# Allegro board interface.brd
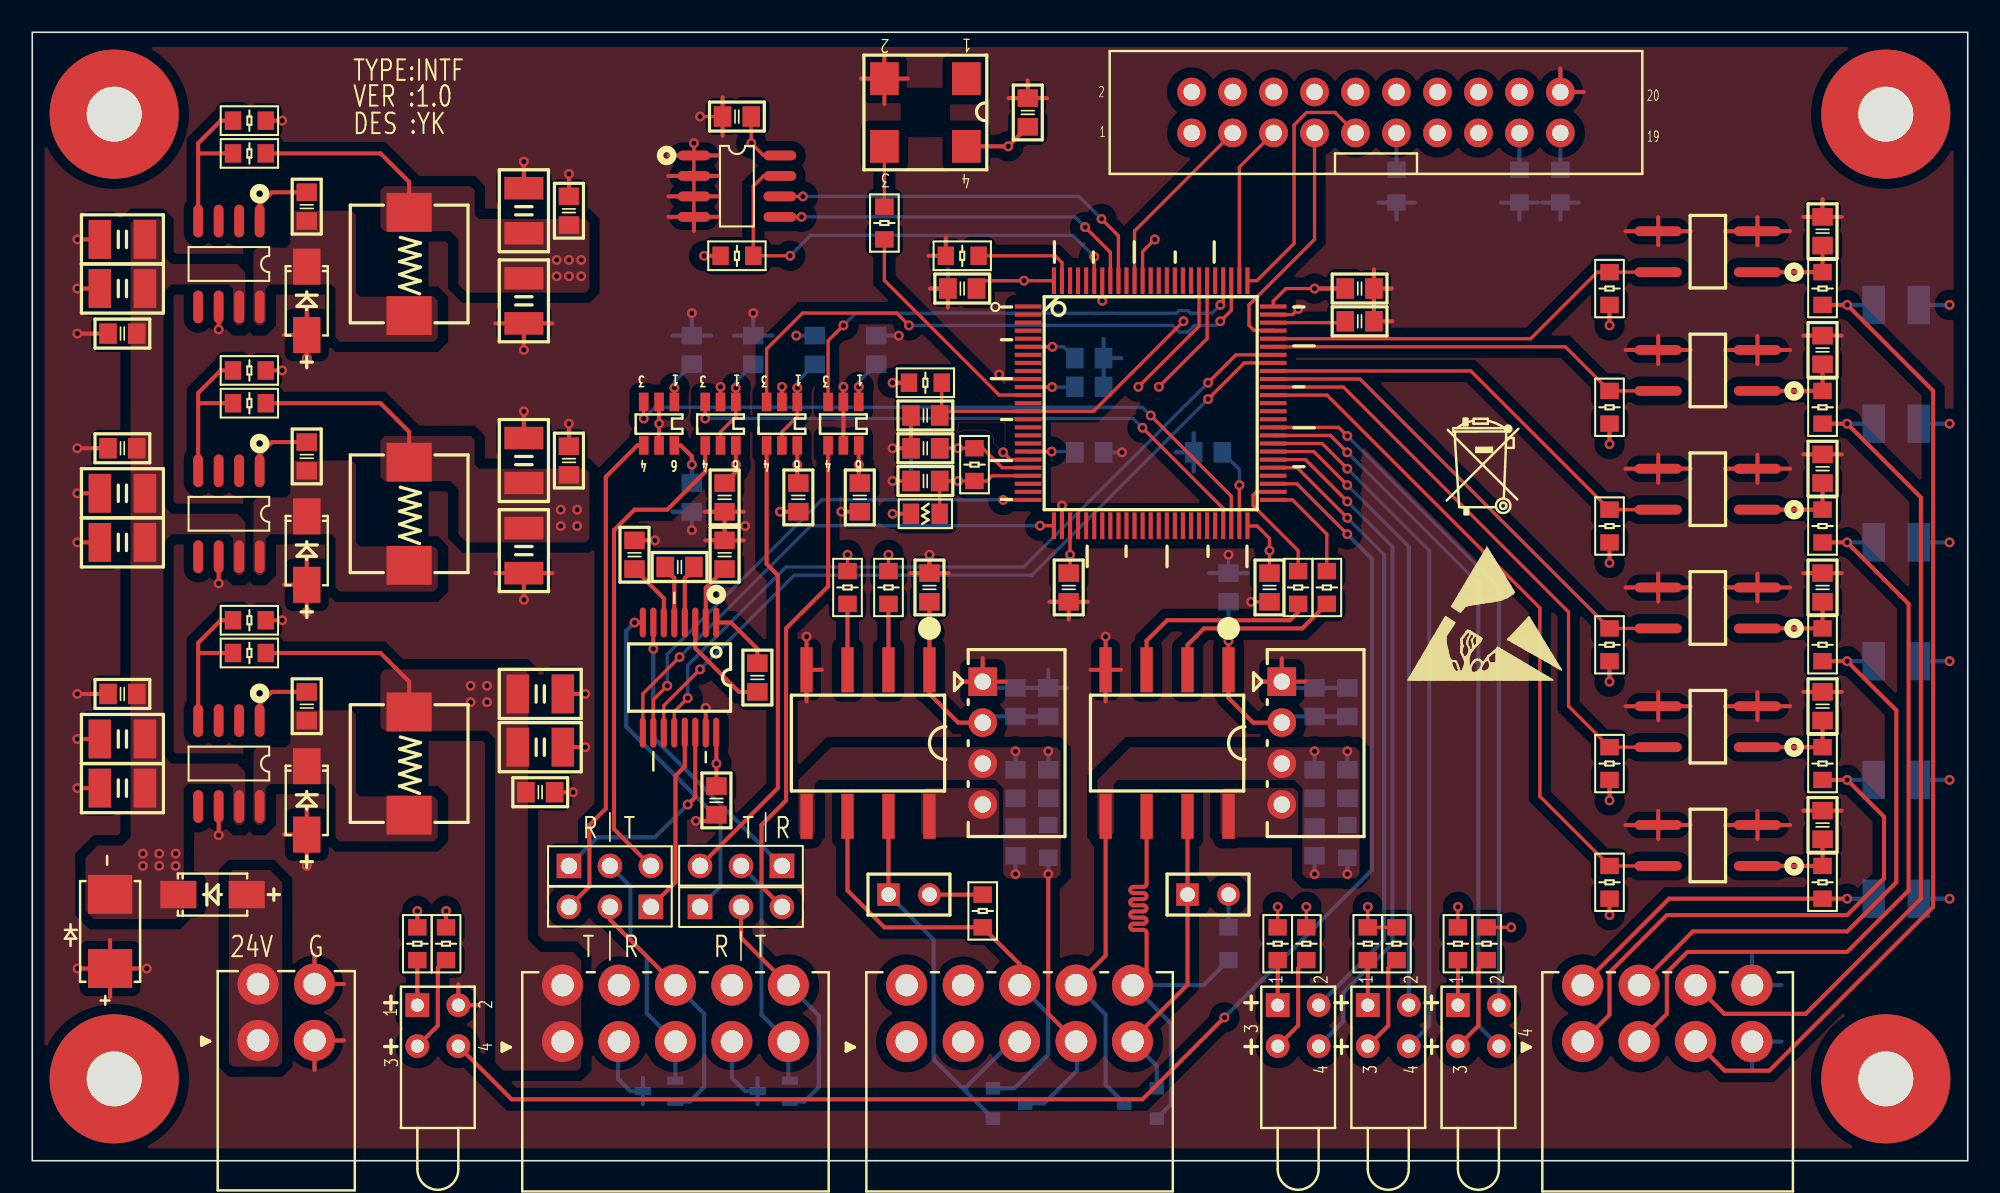
[diagram p0: board, top side]
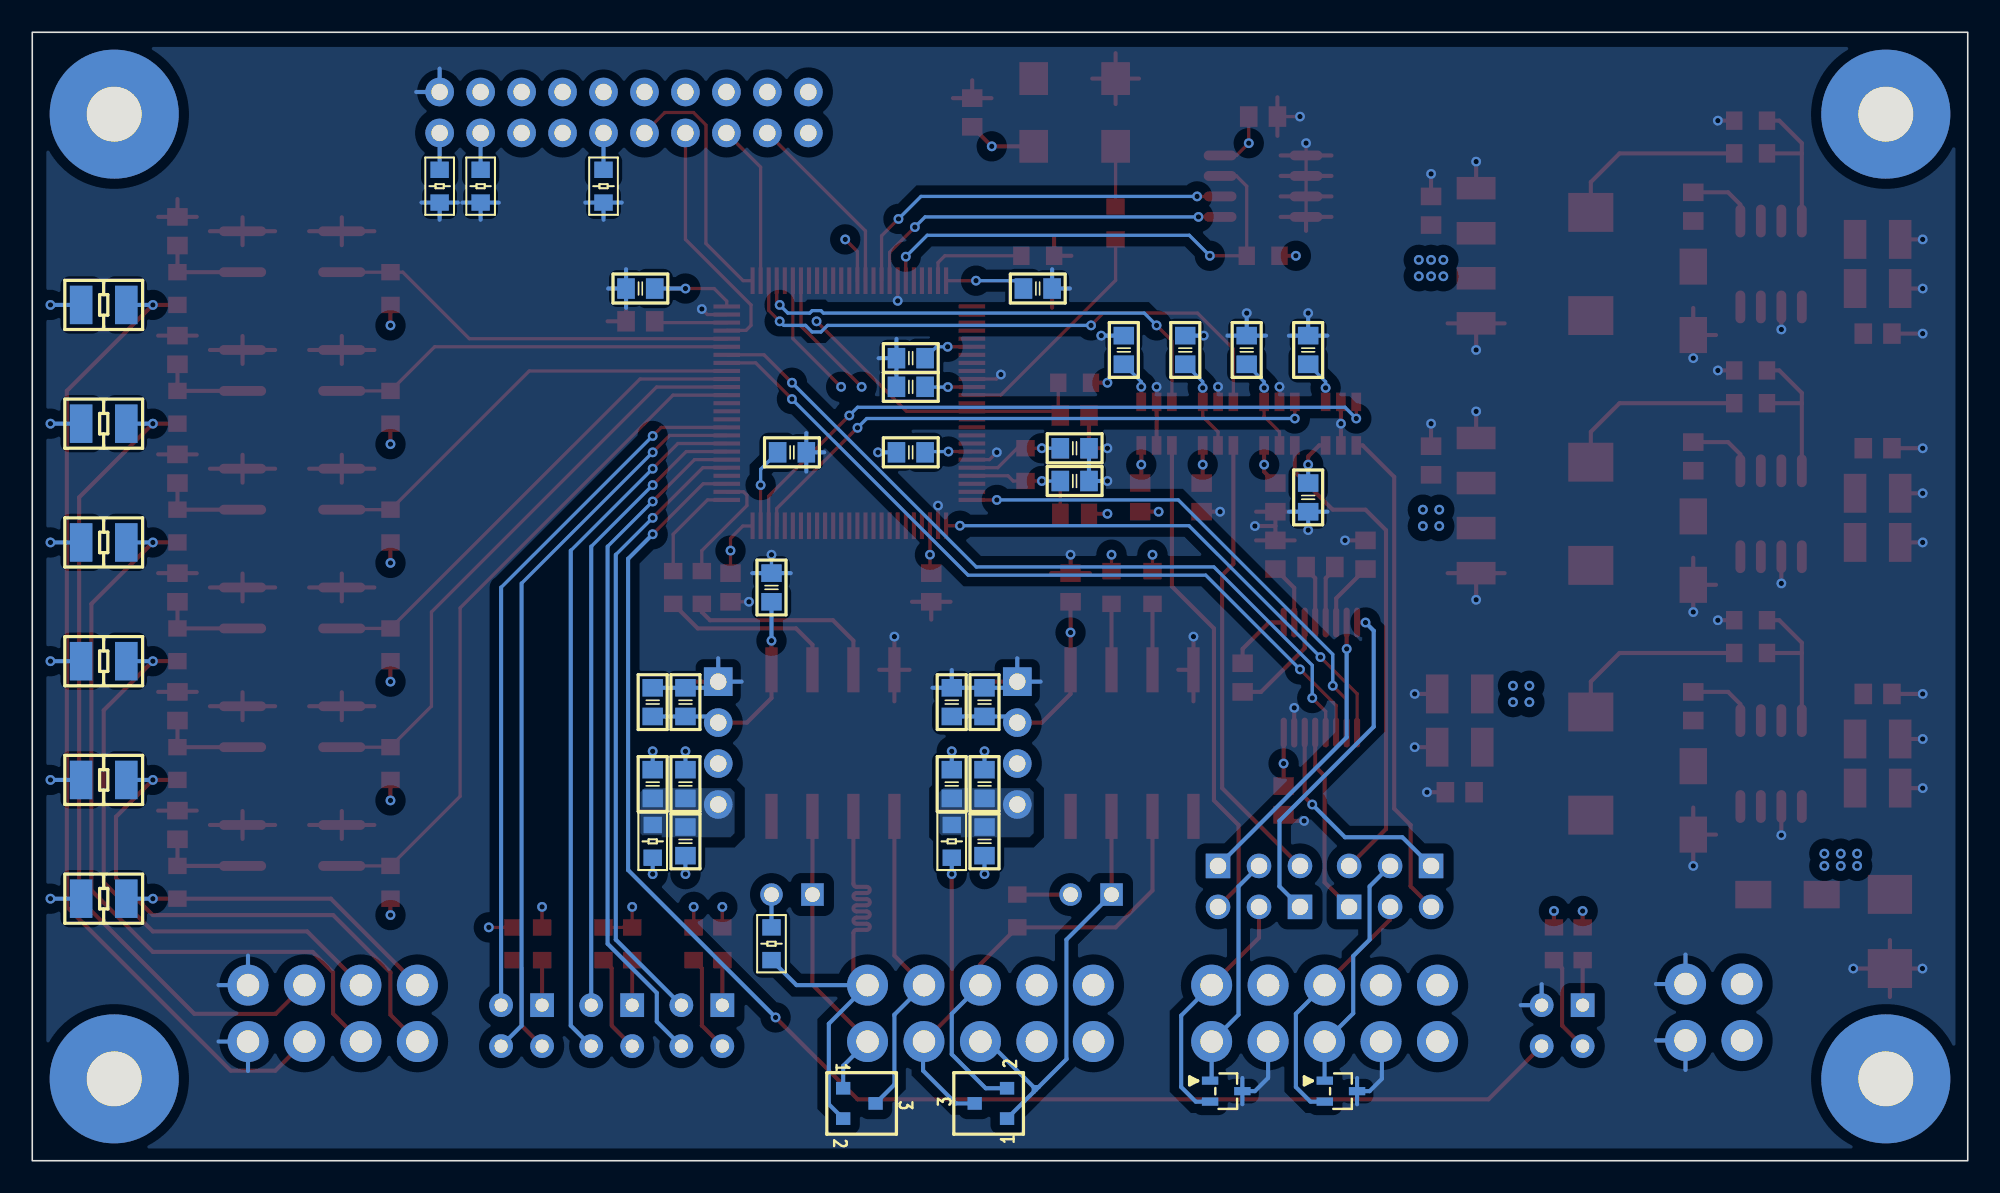
[diagram p1: board, bottom side, seen from below]

Outline 120 x 70 mm; copper layers: TOP, POWRE, GND, BOTTOM. Coordinates in mm from the lower left corner of the outline.
Outline path: rectangle 0,0 120,70

## Design rules (mm)
constraint set DEFAULT: min track width 0.203

## Placement (name value [footprint] x y rotation side)
C1  0.1uF  [C0805]  76.71 35.56 270 top
C2  0.1uF  [C0805]  55.37 44.2 180 bottom
C3  0.1uF  [C0805]  57.66 54.1 180 top
C4  0.1uF  [C0805]  82.3 54.1 0 bottom
C5  0.1uF  [C0805]  65.53 49.78 0 bottom
C6  0.1uF  [C0805]  65.53 48.01 0 bottom
C7  0.1uF  [C0805]  64.26 35.56 270 top
C8  1uF/16V  [C0805]  55.37 44.2 180 top
C9  10uF/16V  [C0805]  57.66 54.1 180 bottom
C10  1uF/16V  [C0805]  82.3 54.1 0 top
C11  0.1uF  [C0805]  65.53 43.94 0 bottom
C12  10uF/16V  [C0805]  82.3 52.07 0 top
C13  10uF/16V  [C0805]  72.9 43.94 180 bottom
C14  1uF/16V  [C0805]  55.37 42.16 180 top
C15  0.1uF  [C0805]  55.37 42.16 180 bottom
C16  0.1uF  [C0805]  61.72 65.02 90 top
C17  0.1uF  [C0805]  55.37 46.23 0 top
C18  0.1uF  [C0805]  44.96 29.97 90 top
C19  0.1uF  [C0805]  40.13 36.83 0 top
C20  0.1uF  [C0805]  42.42 22.35 270 top
C21  0.1uF  [C0805]  42.93 37.59 90 top
C22  0.1uF  [C0805]  37.34 37.59 90 top
C23  0.1uF  [C0805]  40.89 50.29 90 bottom
C24  0.1uF  [C0805]  42.93 41.15 270 top
C25  0.1uF  [C0805]  52.32 50.29 90 bottom
C26  0.1uF  [C0805]  40.89 41.15 270 bottom
C27  0.1uF  [C0805]  43.69 64.77 180 top
C28  0.1uF  [C0805]  47.5 41.15 270 top
C29  0.1uF  [C0805]  48.51 50.29 90 bottom
C30  0.1uF  [C0805]  51.31 41.15 270 top
C31  0.1uF  [C0805]  44.7 50.29 270 bottom
C32  0.1uF  [C0805]  62.99 28.45 90 bottom
C33  1uF/16V  [C0805]  55.63 35.56 90 top
C34  10uF/25V  [C0805]  60.96 19.81 90 bottom
C35  0.1uF  [C0805]  60.96 23.37 90 bottom
C36  1uF/16V  [C0805]  62.99 23.37 90 bottom
C37  4.7uF  [C0805]  60.96 28.45 90 bottom
C38  0.1uF  [C0805]  81.53 28.45 90 bottom
C39  1uF/16V  [C0805]  74.17 35.56 90 bottom
C40  10uF/25V  [C0805]  79.5 19.81 90 bottom
C41  0.1uF  [C0805]  81.53 23.37 90 bottom
C42  1uF/16V  [C0805]  79.5 23.37 90 bottom
C43  4.7uF  [C0805]  79.5 28.45 90 bottom
C44  0.1uF  [C0805]  111 28.19 90 top
C45  0.1uF  [C0805]  111 35.56 90 top
C46  0.1uF  [C0805]  111 20.83 90 top
C47  0.1uF  [C0805]  111 57.66 90 top
C48  0.1uF  [C0805]  111 42.93 90 top
C49  0.1uF  [C0805]  111 50.29 90 top
C50  0.01uF  [C0805]  17.02 28.19 270 top
C51  10uF/50V  [C1210]  5.59 23.11 180 top
C52  10uF/50V  [C1210]  5.59 26.16 180 top
C53  0.1uF  [C0805]  5.59 28.96 180 top
C55  22uF/25V  [C1210]  31.5 28.96 0 top
C56  22uF/25V  [C1210]  31.5 25.65 0 top
C57  1uF/25V  [C0805]  31.5 22.86 0 top
C61  0.01uF  [C0805]  17.02 43.69 270 top
C62  10uF/50V  [C1210]  5.59 41.4 180 top
C63  10uF/50V  [C1210]  5.59 38.35 180 top
C64  0.1uF  [C0805]  5.59 44.2 180 top
C65  22uF/25V  [C1210]  30.48 43.43 90 top
C66  22uF/25V  [C1210]  30.48 37.85 270 top
C67  1uF/25V  [C0805]  33.27 43.43 90 top
C68  0.01uF  [C0805]  17.02 59.18 270 top
C69  10uF/50V  [C1210]  5.59 57.15 180 top
C70  10uF/50V  [C1210]  5.59 54.1 180 top
C71  0.1uF  [C0805]  5.59 51.31 180 top
C72  22uF/25V  [C1210]  30.48 53.34 270 top
C73  22uF/25V  [C1210]  30.48 58.93 90 top
C74  1uF/25V  [C0805]  33.27 58.93 90 top
D1  SSB-LX2300  [LED2X2_54MM]  23.88 9.65 90 top
D2  SSB-LX2300  [LED2X2_54MM]  88.39 9.65 90 top
D3  SSB-LX2300  [LED2X2_54MM]  77.22 9.65 90 top
D4  SSB-LX2300  [LED2X2_54MM]  82.8 9.65 90 top
D9  PSM712  [SOT-23]  60.71 3.56 90 bottom
D10  PSM712  [SOT-23]  68.58 3.56 270 bottom
D11  1N5822  [DO-214AC]  11.18 16.51 0 top
D12  SMAJ26A  [SMA2_350X600]  4.83 14.22 90 top
D13  1N5822  [DO-214AC]  17.02 22.35 270 top
D14  1N5822  [DO-214AC]  17.02 37.85 270 top
D15  1N5822  [DO-214AC]  17.02 53.34 270 top
J1  CON3  [SIP3-100]  35.81 18.29 180 top
J2  CON3  [SIP3-100]  43.94 18.29 0 top
J3  CON3  [SIP3-100]  35.81 15.75 0 top
J4  CON3  [SIP3-100]  43.94 15.75 180 top
J5  CON2  [SIP2]  54.36 16.51 0 top
J6  CON2  [SIP2]  72.9 16.51 0 top
J7  KF2EDGKRH-3.5-4P  [KF2EDGKRH-3_5-4P]  15.75 10.41 0 top
J8  KF2EDGKRH-3.5-10P  [KF2EDGKRH-3_5-10P]  39.88 9.14 0 top
J9  KF2EDGKRH-3.5-10P  [KF2EDGKRH-3_5-10P]  61.21 9.14 0 top
J10  CON1  [MTHP340_800]  5.08 5.08 0 top
J11  CON1  [MTHP340_800]  114.92 64.92 0 top
J12  CON1  [MTHP340_800]  114.92 5.08 0 top
J13  CON1  [MTHP340_800]  5.08 64.92 0 top
J14  KF2EDGKRH-3.5-8P  [KF2EDGKRH-3_5-8P]  103.12 9.14 0 top
L1  BEAD  [L0805]  55.37 40.13 0 top
L2  68uH/0.5A  [SPL2_730X730-MS73-561MT]  23.37 24.64 90 top
L3  68uH/0.5A  [SPL2_730X730-MS73-561MT]  23.37 40.13 90 top
L4  68uH/0.5A  [SPL2_730X730-MS73-561MT]  23.37 55.63 90 top
NOREF  -  []  92.46 43.18 0 top
NOREF#2  -  []  90.17 33.02 0 top
R1  51R  [R0805]  58.42 43.18 270 top
R2  1K  [R0805]  23.88 13.46 90 top
R3  1K  [R0805]  25.65 13.46 90 top
R4  1K  [R0805]  88.39 13.46 90 top
R5  1K  [R0805]  90.17 13.46 90 top
R6  1K  [R0805]  77.22 13.46 90 top
R7  1K  [R0805]  78.99 13.46 90 top
R8  1K  [R0805]  82.8 13.46 90 top
R9  1K  [R0805]  84.58 13.46 90 top
R10  33R  [R0805]  52.83 58.17 90 top
R11  10K  [R0805]  55.37 48.26 0 top
R12  0R  [R0805]  57.66 56.13 0 top
R13  10K  [R0805]  84.58 60.45 90 bottom
R14  10K  [R0805]  92.2 60.45 90 bottom
R15  10K  [R0805]  94.74 60.45 90 bottom
R20  4.7K  [R0805]  43.69 56.13 0 top
R21  120R  [R0805]  58.93 15.49 270 top
R22  1K  [R0805]  53.09 35.56 270 top
R23  0R  [R0805]  50.55 35.56 270 top
R24  1K  [R0805]  62.99 19.81 270 bottom
R25  120R  [R0805]  74.17 13.46 270 bottom
R26  1K  [R0805]  80.26 35.56 270 top
R27  0R  [R0805]  78.49 35.56 270 top
R28  1K  [R0805]  81.53 19.81 270 bottom
R29  2K  [R1210]  115.57 23.62 180 bottom
R30  4.7K  [R0805]  97.79 24.64 90 top
R31  2K  [R1210]  115.57 30.99 180 bottom
R32  4.7K  [R0805]  97.79 32 90 top
R33  4.7K  [R0805]  111 24.64 90 top
R34  4.7K  [R0805]  111 32 90 top
R35  2K  [R1210]  115.57 16.26 180 bottom
R36  4.7K  [R0805]  97.79 17.27 90 top
R37  2K  [R1210]  115.57 53.09 180 bottom
R38  4.7K  [R0805]  97.79 54.1 90 top
R39  4.7K  [R0805]  111 17.27 90 top
R40  4.7K  [R0805]  111 54.1 90 top
R41  2K  [R1210]  115.57 38.35 180 bottom
R42  4.7K  [R0805]  97.79 39.37 90 top
R43  2K  [R1210]  115.57 45.72 180 bottom
R44  4.7K  [R0805]  97.79 46.74 90 top
R45  4.7K  [R0805]  111 39.37 90 top
R46  4.7K  [R0805]  111 46.74 90 top
R47  1K/1%  [R0805]  13.46 33.53 180 top
R48  9.1K/1%  [R0805]  13.46 31.5 0 top
R51  1K/1%  [R0805]  13.46 49.02 180 top
R52  11K/1%  [R0805]  13.46 46.99 0 top
R55  1K/1%  [R0805]  13.46 64.52 180 top
R56  11K/1%  [R0805]  13.46 62.48 0 top
U1  STM32F207VGT6  [QFP100-050-1414]  69.34 46.99 270 top
U2  STM32xx  [JTAG2X10]  71.88 63.75 0 top
U3  TPD2E007DCKR  [SC70-3]  38.86 4.32 270 bottom
U4  MAX3232EEAE  [SOP16_065-790X633]  40.13 29.97 270 top
U5  TPD2E007DCKR  [SC70-3]  45.97 4.32 270 bottom
U6  SN74LVC1T45DBVR  [SOT-23-6P]  42.67 45.72 180 top
U7  SN74LVC1T45DBVR  [SOT-23-6P]  46.48 45.72 180 top
U8  SN74LVC1T45DBVR  [SOT-23-6P]  38.86 45.72 180 top
U9  SN74LVC1T45DBVR  [SOT-23-6P]  50.29 45.72 180 top
U10  AT24C02C  [SOP8_127-620X500]  43.69 60.45 0 top
U11  ISO1050DUB  [SOP8_100_110X30]  51.82 25.91 270 top
U12  B0305S-1W  [PWR4_B0505S-1W]  58.93 29.72 270 top
U13  ISO1050DUB  [SOP8_100_110X30]  70.36 25.91 270 top
U14  B0305S-1W  [PWR4_B0505S-1W]  77.47 29.72 270 top
U15  EL357  [SOP4_254-730X450]  103.89 26.92 180 top
U16  EL357  [SOP4_254-730X450]  103.89 34.29 180 top
U17  EL357  [SOP4_254-730X450]  103.89 19.56 180 top
U18  EL357  [SOP4_254-730X450]  103.89 56.39 180 top
U19  EL357  [SOP4_254-730X450]  103.89 41.66 180 top
U20  EL357  [SOP4_254-730X450]  103.89 49.02 180 top
U21  LM2674MX-ADJ  [SOP8_127-620X500]  12.19 24.64 270 top
U24  LM2674MX-ADJ  [SOP8_127-620X500]  12.19 40.13 270 top
U25  LM2674MX-ADJ  [SOP8_127-620X500]  12.19 55.63 270 top
Y1  25MHz  [X4-0705]  55.37 65.02 180 top

## Library data of the parts
C1-C17 C23-C53 C55-C57 C61-C74 = CAP NP: Tolerance: #TOL; User Part Number: HAMP
C18-C22 = C: Tolerance: #TOL; User Part Number: HAMP
D1-D4 = SSB-LX2300_0: Tolerance: #TOL; User Part Number: HAMP
D9 D10 = ZC2813E/SOT_0: Tolerance: #TOL; User Part Number: HAMP
D11 D13-D15 = DIODE_0: Tolerance: #TOL; User Part Number: HAMP
D12 = ZC2800E/SOT_1: Tolerance: #TOL; User Part Number: HAMP
J1-J4 = CON3: User Part Number: HAMP; Tolerance: #TOL
J5 J6 = CON2: Tolerance: #TOL; User Part Number: HAMP
J7 = CON4
J8 J9 = CON10A
J10-J13 = CON1: User Part Number: HAMP; Tolerance: #TOL
J14 = CON8A
L1-L4 = INDUCTOR: Tolerance: #TOL; User Part Number: HAMP
R1-R15 R20-R48 R51 R52 R55 R56 = R: Tolerance: #TOL; User Part Number: HAMP
U1 = STM32F207VGT6: User Part Number: HAMP; Tolerance: #TOL
U2 = STM32_JTAG
U3 U5 = TPD2E007
U4 = MAX3232EEAE: Tolerance: #TOL; User Part Number: HAMP
U6-U9 = SN74LVC1T45DBVR: Tolerance: #TOL
U10 = AT24C0x: Tolerance: #TOL; User Part Number: HAMP
U11 U13 = ISO1050
U12 U14 = B0505S-1W: Tolerance: #TOL; User Part Number: HAMP
U15-U20 = PC817: User Part Number: HAMP; Tolerance: #TOL
U21 U24 U25 = LM2674-ADJ: Tolerance: #TOL; User Part Number: HAMP
Y1 = OSC-D36A-ZPB: Tolerance: #TOL; User Part Number: HAMP

## Footprints (pads in the part's own frame, mm; a bottom-side part is the same pattern mirrored in y, then rotated)
C0805
  rect 1.092x1.27 smd: 1(-0.889,0) 2(0.889,0)
C1210
  rect 1.397x2.413 smd: 1(-1.397,0) 2(1.397,0)
DO-214AC
  rect 2.235x1.702 smd: 1(2.121,0) 2(-2.121,0)
JTAG2X10
  round 1.778 hole 1.016: 1(0,0) 2(0,2.54) 3(2.54,0) 4(2.54,2.54) 5(5.08,0) 6(5.08,2.54) 7(7.62,0) 8(7.62,2.54) 9(10.16,0) 10(10.16,2.54) 11(12.7,0) 12(12.7,2.54) 13(15.24,0) 14(15.24,2.54) 15(17.78,0) 16(17.78,2.54) 17(20.32,0) 18(20.32,2.54) 19(22.86,0) 20(22.86,2.54)
KF2EDGKRH-3_5-4P
  round 2.54 hole 1.397: 1(-1.75,-2.949) 2(-1.75,0.549) 3(1.75,-2.949) 4(1.75,0.549)
KF2EDGKRH-3_5-8P
  round 2.54 hole 1.397: 1(-7,-1.75) 2(-7,1.75) 3(-3.5,-1.75) 4(-3.5,1.75) 5(0,-1.75) 6(0,1.75) 7(3.5,-1.75) 8(3.5,1.75)
KF2EDGKRH-3_5-10P
  round 2.54 hole 1.397: 1(-7,-1.75) 2(-7,1.75) 3(-3.5,-1.75) 4(-3.5,1.75) 5(0,-1.75) 6(0,1.75) 7(3.5,-1.75) 8(3.5,1.75) 9(7,-1.75) 10(7,1.75)
L0805
  rect 1.021x1.27 smd: 1(-0.889,0) 2(0.889,0)
LED2X2_54MM
  rect 1.473x1.473 hole 0.813: 1(0,0)
  round 1.473 hole 0.813: 2(0,-2.54) 3(-2.54,0) 4(-2.54,-2.54)
MTHP340_800
  round 8.001 hole 3.404: 1(0,0)
PWR4_B0505S-1W
  rect 1.778x1.778 hole 1.016: 1(0,0)
  round 1.778 hole 1.016: 2(2.54,0) 3(5.08,0) 4(7.62,0)
QFP100-050-1414
  rect 0.254x1.651 smd: 1(-6,-7.6) 2(-5.499,-7.6) 3(-4.999,-7.6) 4(-4.501,-7.6) 5(-4,-7.6) 6(-3.5,-7.6) 7(-3,-7.6) 8(-2.499,-7.6) 9(-1.999,-7.6) 10(-1.501,-7.6) 11(-1.001,-7.6) 12(-0.5,-7.6) 13(0,-7.6) 14(0.5,-7.6) 15(1.001,-7.6) 16(1.501,-7.6) 17(1.999,-7.6) 18(2.499,-7.6) 19(3,-7.6) 20(3.5,-7.6) 21(4,-7.6) 22(4.501,-7.6) 23(4.999,-7.6) 24(5.499,-7.6) 25(6,-7.6) 51(6,7.6) 52(5.499,7.6) 53(4.999,7.6) 54(4.501,7.6) 55(4,7.6) 56(3.5,7.6) 57(3,7.6) 58(2.499,7.6) 59(1.999,7.6) 60(1.501,7.6) 61(1.001,7.6) 62(0.5,7.6) 63(0,7.6) 64(-0.5,7.6) 65(-1.001,7.6) 66(-1.501,7.6) 67(-1.999,7.6) 68(-2.499,7.6) 69(-3,7.6) 70(-3.5,7.6) 71(-4,7.6) 72(-4.501,7.6) 73(-4.999,7.6) 74(-5.499,7.6) 75(-6,7.6)
  rect 1.651x0.254 smd: 26(7.6,-6) 27(7.6,-5.499) 28(7.6,-4.999) 29(7.6,-4.501) 30(7.6,-4) 31(7.6,-3.5) 32(7.6,-3) 33(7.6,-2.499) 34(7.6,-1.999) 35(7.6,-1.501) 36(7.6,-1.001) 37(7.6,-0.5) 38(7.6,0) 39(7.6,0.5) 40(7.6,1.001) 41(7.6,1.501) 42(7.6,1.999) 43(7.6,2.499) 44(7.6,3) 45(7.6,3.5) 46(7.6,4) 47(7.6,4.501) 48(7.6,4.999) 49(7.6,5.499) 50(7.6,6) 76(-7.6,6) 77(-7.6,5.499) 78(-7.6,4.999) 79(-7.6,4.501) 80(-7.6,4) 81(-7.6,3.5) 82(-7.6,3) 83(-7.6,2.499) 84(-7.6,1.999) 85(-7.6,1.501) 86(-7.6,1.001) 87(-7.6,0.5) 88(-7.6,0) 89(-7.6,-0.5) 90(-7.6,-1.001) 91(-7.6,-1.501) 92(-7.6,-1.999) 93(-7.6,-2.499) 94(-7.6,-3) 95(-7.6,-3.5) 96(-7.6,-4) 97(-7.6,-4.501) 98(-7.6,-4.999) 99(-7.6,-5.499) 100(-7.6,-6)
R0805
  rect 1.016x1.143 smd: 1(-1.016,0) 2(1.016,0)
R1210
  rect 1.397x2.388 smd: 1(-1.399,0) 2(1.399,0)
SC70-3
  rect 0.508x1.016 smd: 1(-0.65,-1.001) 2(0.65,-1.001) 3(0,1.001)
SIP2
  rect 1.397x1.397 hole 0.914: 1(-1.27,0)
  round 1.397 hole 0.914: 2(1.27,0)
SIP3-100
  rect 1.524x1.524 hole 1.016: 1(2.54,0)
  round 1.524 hole 1.016: 2(0,0) 3(-2.54,0)
SMA2_350X600
  rect 2.413x2.743 smd: 1(-2.301,0) 2(2.301,0)
SOP4_254-730X450
  oval 2.921x0.61 smd: 1(-3.076,1.27) 2(-3.076,-1.27) 3(3.076,-1.27) 4(3.076,1.27)
SOP8_100_110X30
  rect 2.794x0.762 smd: 1(-4.547,3.81) 2(-4.547,1.27) 3(-4.547,-1.27) 4(-4.547,-3.81) 5(4.547,-3.81) 6(4.547,-1.27) 7(4.547,1.27) 8(4.547,3.81)
SOP8_127-620X500
  oval 2.032x0.61 smd: 1(-2.665,1.905) 2(-2.665,0.635) 3(-2.665,-0.635) 4(-2.665,-1.905) 5(2.665,-1.905) 6(2.665,-0.635) 7(2.665,0.635) 8(2.665,1.905)
SOP16_065-790X633
  oval 1.854x0.381 smd: 1(-3.414,2.276) 2(-3.414,1.626) 3(-3.414,0.975) 4(-3.414,0.325) 5(-3.414,-0.325) 6(-3.414,-0.975) 7(-3.414,-1.626) 8(-3.414,-2.276) 9(3.414,-2.276) 10(3.414,-1.626) 11(3.414,-0.975) 12(3.414,-0.325) 13(3.414,0.325) 14(3.414,0.975) 15(3.414,1.626) 16(3.414,2.276)
SOT-23
  rect 0.787x0.889 smd: 1(-0.94,-1.143) 2(0.94,-1.143) 3(0,0.864)
SOT-23-6P
  rect 0.599x1.151 smd: 1(-0.95,-1.349) 2(0,-1.349) 3(0.95,-1.349) 4(0.95,1.349) 5(0,1.349) 6(-0.95,1.349)
SPL2_730X730-MS73-561MT
  rect 2.413x2.794 smd: 1(-3.2,0) 2(3.2,0)
X4-0705
  rect 1.778x2.032 smd: 1(-2.54,-2.101) 2(2.54,-2.101) 3(2.54,2.101) 4(-2.54,2.101)

## Nets
AVDD3V3: C14.1 C15.1 L1.2 R1.2 U1.22
GND: C1.2 C2.2 C3.2 C4.2 C5.2 C6.2 C7.2 C8.2 C9.2 C10.2 C11.2 C12.2 C13.2 C14.2 C15.2 C16.2 C17.1 C20.2 C21.2 C22.2 C23.2 C24.2 C25.2 C26.2 C27.2 C28.2 C29.2 C30.2 C31.1 C32.2 C33.2 C37.2 C38.2 C39.2 C43.2 C44.2 C45.2 C46.2 C47.2 C48.2 C49.2 C51.2 C52.2 C53.2 C55.2 C56.2 C57.2 C62.2 C63.2 C64.2 C65.2 C66.2 C67.2 C69.2 C70.2 C71.2 C72.2 C73.2 C74.2 D1.2 D12.1 D13.1 D14.1 D15.1 J7.3 J7.4 J8.3 J8.4 J8.7 J8.8 J9.3 J9.4 J14.7 J14.8 R12.1 R13.1 R14.1 R15.1 R47.1 R51.1 R55.1 U1.10 U1.20 U1.27 U1.74(VSS_74) U1.94 U2.4 U2.6 U2.8 U2.10 U2.12 U2.14 U2.16 U2.18 U2.20 U3.3 U4.15 U5.3 U6.2 U7.2 U8.2 U8.5 U9.2 U9.5 U10.1 U10.2 U10.3 U10.4 U11.4 U12.1 U13.4 U14.1 U15.2 U15.3(EMITTER) U16.2 U16.3(EMITTER) U17.2 U17.3(EMITTER) U18.2 U18.3(EMITTER) U19.2 U19.3(EMITTER) U20.2 U20.3(EMITTER) U21.6 U24.6 U25.6 Y1.2
VDD3V3: C1.1 C3.1 C4.1 C5.1 C6.1 C7.1 C9.1 C10.1 C11.1 C16.1 C20.1 C23.1 C25.1 C27.1 C29.1 C31.2 C32.1 C33.1 C37.1 C38.1 C39.1 C43.1 C72.1 C73.1 C74.1 L1.1 L4.2 R2.2 R3.2 R4.2 R5.2 R6.2 R7.2 R8.2 R9.2 R11.1 R20.1 R30.1 R32.1 R36.1 R38.1 R42.1 R44.1 R56.2 U1.6 U1.11 U1.19 U1.28 U1.50 U1.75 U1.100 U2.1(VTREF) U2.2 U4.16(VCC) U6.1 U6.5 U7.1 U7.5 U8.1 U9.1 U10.8 U11.1 U12.2(VIN) U13.1 U14.2(VIN) Y1.4(VCC)
VDD5V: C24.1 C26.1 C28.1 C30.1 C55.1 C56.1 C57.1 J8.1 J8.2 L2.2 R48.2 U6.6(VCCB) U7.6(VCCB) U8.6(VCCB) U9.6(VCCB)
VDD12V_O: C65.1 C66.1 C67.1 J9.1 J9.2 L3.2 R52.2
VDD24V: C51.1 C52.1 C53.1 C62.1 C63.1 C64.1 C69.1 C70.1 C71.1 D11.2(K) D12.2(CATHODE) R29.1 R31.1 R35.1 R37.1 R41.1 R43.1 U21.7 U24.7 U25.7
CAN1_5V: C34.2 C35.1 C36.1 R24.1 U11.8(VCC2) U12.4
CAN1G: C34.1 C35.2 C36.2 D9.3 J9.7 R24.2 U11.5 U12.3
CAN1H: D9.1 J5.1 J9.5 U11.7
CAN1L: D9.2(C2) J9.6 R21.2 U11.6
CAN2_5V: C40.2 C41.1 C42.1 R28.1 U13.8(VCC2) U14.4
CAN2G: C40.1 C41.2 C42.2 D10.3 J9.8 R28.2 U13.5 U14.3
CAN2H: D10.1 J6.1 J9.9 U13.7
CAN2L: D10.2(C2) J9.10 R25.2 U13.6
MCU_B_RX3: J3.3 U8.4
MCU_B_RX4: J4.3 U9.4
MCU_B_TX3: J1.3 U6.4
MCU_B_TX4: J2.3 U7.4
MCU_CAN1D: R23.1 U1.82
MCU_CAN1R: R22.1 U1.81
MCU_CAN2D: R27.1 U1.52
MCU_CAN2R: R26.1 U1.51
MCU_CLK: R10.1 U1.12
MCU_JTAG_TCK: U1.76 U2.9
MCU_JTAG_TDI: U1.77 U2.5
MCU_JTAG_TDO: U1.89 U2.13
MCU_JTAG_TMS: U1.72 U2.7
MCU_JTAG_TRSTN: U1.90 U2.3
MCU_NRST: C17.2 R11.2 U1.14 U2.15
MCU_RUN: D1.4(CATHODE2) U1.53
MCU_RX1: U1.69 U4.12
MCU_RX2: U1.26 U4.9
MCU_RX3: U1.48 U8.3
MCU_RX4: U1.79 U9.3
MCU_SCL: U1.92 U10.6
MCU_SDA: U1.93 U10.5
MCU_TX1: U1.68 U4.11
MCU_TX2: U1.25 U4.10
MCU_TX3: U1.47 U6.3
MCU_TX4: U1.78 U7.3
MCU_WP: R20.2 U1.95 U10.7(WP)
OPT_D1: R30.2 U1.65 U15.4
OPT_D2: R36.2 U1.64 U17.4
OPT_D3: R42.2 U1.67 U19.4
OPT_D4: R32.2 U1.66 U16.4
OPT_D5: R38.2 U1.71 U18.4
OPT_D6: R44.2 U1.70 U20.4
OPT_IN1: J14.1 R29.2 R33.1
OPT_IN2: J14.2 R35.2 R39.1
OPT_IN3: J14.3 R41.2 R45.1
OPT_IN4: J14.4 R31.2 R34.1
OPT_IN5: J14.5 R37.2 R40.1
OPT_IN6: J14.6 R43.2 R46.1
OPT_LED1: D2.2 U1.60
OPT_LED2: D2.4(CATHODE2) U1.59
OPT_LED3: D3.2 U1.55
OPT_LED4: D3.4(CATHODE2) U1.56
OPT_LED5: D4.2 U1.57
OPT_LED6: D4.4(CATHODE2) U1.58
OVDD24V: D11.1 J7.1 J7.2
RS232_RX1: J3.1 U4.13
RS232_RX2: J4.1 U4.8
RS232_TX1: J1.1 U4.14
RS232_TX2: J2.1 U4.7
RS_RX1: J3.2 J8.6 U3.2(IO2)
RS_RX2: J4.2 J8.10 U5.2(IO2)
RS_TX1: J1.2 J8.5 U3.1
RS_TX2: J2.2 J8.9 U5.1
N906412: R22.2 U11.2
N906436: R23.2 U11.3
N916667: D1.1 R2.1
N916697: D1.3 R3.1
N917504: R10.2 Y1.3
N939209: C18.1 U4.3
N939217: C18.2 U4.1
N939351: C19.1 U4.5
N939359: C19.2 U4.4
N939363: C21.1 U4.2
N939401: C22.1 U4.6
N940473: C44.1 R33.2 U15.1
N940651: C46.1 R39.2 U17.1
N944032: C48.1 R45.2 U19.1
N944787: C45.1 R34.2 U16.1
N944965: C47.1 R40.2 U18.1
N945149: C49.1 R46.2 U20.1
N954923: R47.2 R48.1 U21.4
N955027: C50.1 U21.1
N955031: C50.2 D13.2(K) L2.1 U21.8(VSW)
N958142: R51.2 R52.1 U24.4
N958246: C61.1 U24.1
N958250: C61.2 D14.2(K) L3.1 U24.8(VSW)
N959208: R55.2 R56.1 U25.4
N959312: C68.1 U25.1
N959316: C68.2 D15.2(K) L4.1 U25.8(VSW)
N963314: R26.2 U13.2
N963338: R27.2 U13.3
N9062780: J5.2 R21.1
N9631840: J6.2 R25.1
N16779023: R12.2 U1.99
N16782804: D2.1 R4.1
N16782939: D2.3 R5.1
N16782977: D3.1 R6.1
N16783006: D3.3 R7.1
N16783035: D4.1 R8.1
N16783064: D4.3 R9.1
N16794703: C13.1 U1.49
N16794705: C12.1 U1.73
N16799024: C2.1 C8.1 R1.1 U1.21
N16895166: R13.2 U2.11
N16895168: R15.2 U2.19
N16895170: R14.2 U2.17

Pads without a net: J10 1; J11 1; J12 1; J13 1; U1 1 2 3 4 5 7 8 9 13 15 16 17 18 23 24 29 30 31 32 33 34 35 36 37 38 39 40 41 42 43 44 45 46 54 61 62 63 80 83 84 85 86 87 88 91 96 97 98; U21 2 3 5; U24 2 3 5; U25 2 3 5; Y1 1

## Via types
v1: diameter 0.61, hole 0.33, TOP to BOTTOM, 177 vias

## Routing (per net, layer and track width the routed paths; a pad name or vN(x,y) marks a point on that pad's centre or on a via; arc(x,y) is an arc through that point)
AVDD3V3: length 8.8
  TOP w0.203: U1.22 59.51,42.49 59.18,42.16 R1.2 v1(57.4,42.16) C14.1 L1.2
  BOTTOM w0.203: C14.1 v1(57.4,42.16)
GND: length 462.7
  TOP w0.203: U1.27 v1(63.84,40.64) ; C14.2 v1(53.34,42.16) ; v1(59.94,48.77) 60.22,48.49 U1.10 ; v1(41.02,63.12) U10.1 U10.3 U10.4 ; U1.94 v1(66.34,53.34) ; C27.2 v1(41.4,64.77) ; v1(78.49,52.83) 78.14,52.49 U1.74 ; C1.2 v1(75.56,34.67) ; v1(60.2,43.94) 60.65,43.49 U1.20
  TOP w0.254: 96.19,66.29 U2.20 94.74,67.74 ; C70.2 v1(2.79,54.1) ; U15.2 108.98,28.19 ; U15.2 106.96,27.33 ; U15.2 106.96,29.06 ; U15.2 104.94,28.19 ; 60.53,65.91 C16.2 ; C16.2 62.92,65.91 ; C16.2 61.72,67.02 ; 106.96,42.06 U19.2 ; U19.2 104.94,42.93 ; U19.2 108.98,42.93 ; U19.2 106.96,43.79 ; 55.63,36.45 v1(55.63,37.59) ; 55.63,36.45 54.43,36.45 ; 55.63,36.45 56.82,36.45 ; C72.2 32.25,51.94 ; C72.2 28.71,51.94 ; C72.2 v1(30.48,50.29) ; C24.2 44.12,40.26 ; C24.2 41.73,40.26 ; C24.2 42.93,39.37 ; D12.1 v1(7.1,11.92) ; D12.1 4.83,13.69 ; D12.1 v1(2.81,11.92) ; D12.1 4.83,10.16 ; 84.33,52.07 C12.2 C10.2 ; 106.96,19.96 U17.2 ; U17.2 108.98,20.83 ; U17.2 104.94,20.83 ; U17.2 106.96,21.69 ; C7.2 65.46,34.67 ; C7.2 64.26,33.57 ; C7.2 63.07,34.67 ; U25.6 v1(11.56,51.56) ; 109.8,58.55 C47.2 ; C47.2 111,59.65 ; C47.2 112.19,58.55 ; 42.6,61.09 39.45,61.09 ; U18.3 100.81,58.52 ; U18.3 102.83,57.66 ; U18.3 98.79,57.66 ; U18.3 100.81,56.79 ; 55.66,54.1 C3.2 56.77,52.91 ; 98.79,28.19 U15.3 ; U15.3 100.81,29.06 ; U15.3 100.81,27.33 ; U15.3 102.83,28.19 ; 19.33,7.47 J7.3 17.5,5.64 ; 98.79,35.56 U16.3 ; U16.3 100.81,36.42 ; U16.3 100.81,34.7 ; U16.3 102.83,35.56 ; 109.8,43.81 C48.2 112.19,43.81 ; U16.2 106.96,36.42 ; U16.2 106.96,34.7 ; U16.2 108.98,35.56 ; U16.2 104.94,35.56 ; C55.2 v1(34.29,28.96) ; 15.61,20.23 D13.1 ; D13.1 17.02,21.91 ; D13.1 v1(17.02,18.29) ; C71.2 v1(2.79,51.31) ; C20.2 42.04,21.08 v1(41.15,21.08) ; Y1.2 52.83,68.7 ; Y1.2 54.28,67.12 ; Y1.2 52.83,65.55 ; Y1.2 51.38,67.12 ; D14.1 17.02,37.4 ; D14.1 15.61,35.73 ; D14.1 v1(17.02,34.04) ; C74.2 v1(33.27,61.21) ; C17.1 C8.2 v1(53.34,44.2) ; R47.1 v1(15.49,33.53) ; 28.71,36.45 C66.2 ; C66.2 v1(30.48,34.8) ; C66.2 32.25,36.45 ; C53.2 v1(2.79,28.96) ; 76.02,29.72 U14.1 ; U14.1 78.92,29.72 ; U14.1 77.47,31.17 ; C67.2 v1(33.27,45.72) ; v1(50.29,48.01) U9.2 U9.5 ; 109.8,36.45 112.19,36.45 ; C64.2 v1(2.79,44.2) ; U21.6 v1(11.56,20.19) ; U8.5 v1(38.86,45.72) U8.2 ; U19.3 100.81,43.79 ; U19.3 98.79,42.93 ; U19.3 100.81,42.06 ; U19.3 102.83,42.93 ; C62.2 v1(2.79,41.4) ; U12.1 60.38,29.72 ; U12.1 57.48,29.72 ; U12.1 58.93,31.17 ; 56.64,57.26 R12.1 55.58,56.13 ; 66.55,28.5 U13.4 ; U13.4 67.49,30.45 ; U13.4 v1(66.55,32.51) ; U13.4 65.61,30.45 ; 42.6,62.36 U10.1 39.45,62.36 ; 15.61,51.22 D15.1 ; D15.1 17.02,52.9 ; D15.1 v1(17.02,49.78) ; U11.4 v1(48.01,32.51) ; U11.4 48.95,30.45 ; U11.4 48.01,28.5 ; 42.8,65.96 C27.2 42.8,63.58 ; C51.2 v1(2.79,23.11) ; 30.48,44.83 v1(30.48,46.48) ; R51.1 v1(15.49,49.02) ; U10.4 42.6,58.55 ; U10.4 41.02,57.68 ; U10.4 39.45,58.55 ; 42.6,59.82 U10.3 39.45,59.82 ; 106.96,49.43 U20.2 ; U20.2 104.94,50.29 ; U20.2 108.98,50.29 ; U20.2 106.96,51.16 ; 26.42,10.95 D1.2 27.71,9.65 ; 42.93,39.37 v1(44.2,39.37) ; 42.93,39.37 C21.2 ; U4.15 v1(41.76,28.09) ; 100.81,19.96 U17.3 ; U17.3 98.79,20.83 ; U17.3 102.83,20.83 ; U17.3 100.81,21.69 ; 109.8,21.72 C46.2 112.19,21.72 ; C56.2 v1(34.29,25.65) ; 112.19,29.08 C44.2 109.8,29.08 ; 98.79,50.29 U20.3 ; U20.3 102.83,50.29 ; U20.3 100.81,51.16 ; U20.3 100.81,49.43 ; C22.2 v1(38.61,38.48) ; C63.2 v1(2.79,38.35) ; C21.2 44.12,38.48 ; C21.2 41.73,38.48 ; C30.2 v1(50.16,40.26) ; C52.2 v1(2.79,26.16) ; C69.2 v1(2.79,57.15) ; U7.2 v1(46.48,48.01) ; 109.8,51.18 112.19,51.18 ; U24.6 v1(11.56,35.81) ; C10.2 83.19,55.3 ; C10.2 84.29,54.1 ; U18.2 106.96,58.52 ; U18.2 104.94,57.66 ; U18.2 106.96,56.79 ; U18.2 108.98,57.66 ; R55.1 v1(15.49,64.52) ; 19.33,10.96 J7.4 17.5,12.79 ; U6.2 v1(42.67,48.01) ; C57.2 v1(33.53,22.86) ; C73.2 v1(30.48,61.98) ; C28.2 v1(46.35,40.26)
  GND w0.203: 86.18,66.29 U2.14 ; U2.14 87.12,67.23 ; U2.14 88.06,66.29 ; U2.14 87.12,65.35 ; 76.4,29.72 U14.1 ; U14.1 77.47,30.78 ; U14.1 78.54,29.72 ; U14.1 77.47,28.65 ; J8.8 43.38,12.34 ; J8.8 41.93,10.89 ; J8.8 43.38,9.45 ; J8.8 44.83,10.89 ; J14.7 108.07,7.39 ; J14.7 106.62,8.84 ; J14.7 105.18,7.39 ; J14.7 106.62,5.95 ; J7.4 17.5,12.41 ; J7.4 16.05,10.96 ; J7.4 17.5,9.51 ; J7.4 18.95,10.96 ; 34.93,10.89 J8.4 ; J8.4 36.38,9.45 ; J8.4 37.83,10.89 ; J8.4 36.38,12.34 ; 106.62,9.45 J14.8 ; J14.8 108.07,10.89 ; J14.8 105.18,10.89 ; J14.8 106.62,12.34 ; J8.7 43.38,8.84 ; J8.7 44.83,7.39 ; J8.7 41.93,7.39 ; J8.7 43.38,5.95 ; U2.4 74.42,67.23 ; U2.4 75.36,66.29 ; U2.4 73.48,66.29 ; U2.4 74.42,65.35 ; 92.2,65.35 U2.18 ; U2.18 91.26,66.29 ; U2.18 92.2,67.23 ; U2.18 93.14,66.29 ; 26.42,8.74 D1.2 ; D1.2 25.5,9.65 ; D1.2 27.33,9.65 ; D1.2 26.42,10.57 ; U2.10 82.98,66.29 ; U2.10 82.04,65.35 ; U2.10 82.04,67.23 ; U2.10 81.1,66.29 ; 57.71,9.45 J9.4 ; J9.4 56.27,10.89 ; J9.4 59.16,10.89 ; J9.4 57.71,12.34 ; 83.64,66.29 U2.12 ; U2.12 84.58,67.23 ; U2.12 85.52,66.29 ; U2.12 84.58,65.35 ; U2.8 80.44,66.29 ; U2.8 78.56,66.29 ; U2.8 79.5,67.23 ; U2.8 79.5,65.35 ; 16.05,7.47 J7.3 ; J7.3 17.5,8.91 ; J7.3 17.5,6.02 ; J7.3 18.95,7.47 ; U2.6 77.9,66.29 ; U2.6 76.02,66.29 ; U2.6 76.96,65.35 ; U2.6 76.96,67.23 ; J8.3 36.38,8.84 ; J8.3 37.83,7.39 ; J8.3 36.38,5.95 ; J8.3 34.93,7.39 ; 94.74,65.35 U2.20 ; U2.20 95.68,66.29 ; U2.20 93.8,66.29 ; U2.20 94.74,67.23 ; 57.86,29.72 U12.1 ; U12.1 58.93,30.78 ; U12.1 59.99,29.72 ; U12.1 58.93,28.65 ; 89.66,65.35 U2.16 ; U2.16 88.72,66.29 ; U2.16 89.66,67.23 ; U2.16 90.6,66.29 ; 56.27,7.39 J9.3 ; J9.3 57.71,5.95 ; J9.3 59.16,7.39 ; J9.3 57.71,8.84
  BOTTOM w0.203: 74.17,36.45 v1(74.17,37.59)
  BOTTOM w0.254: 91.07,59.44 R14.1 ; R14.1 93.33,59.44 ; R14.1 92.2,58.37 ; 48.51,51.18 v1(47.37,51.18) ; 17.5,12.79 J7.4 19.33,10.96 ; 96.19,66.29 U2.20 94.74,67.74 ; U5.3 44.97,5.13 ; U5.3 44.97,3.51 ; U5.3 44.2,4.32 43.38,5.14 J8.7 ; C10.2 84.29,54.1 ; C10.2 83.19,55.3 ; C10.2 83.19,52.91 ; 106.62,5.57 J14.7 108.45,7.39 ; C26.2 v1(40.89,39.12) ; C26.2 42.09,40.26 ; C26.2 39.7,40.26 ; 108.45,10.89 J14.8 106.62,12.72 ; C32.2 C37.2 59.31,29.34 U12.1 ; C32.2 62.99,30.44 ; C32.2 64.19,29.34 ; C6.2 C5.2 ; C5.2 67.53,49.78 ; C5.2 66.42,50.98 ; 44.7,51.18 45.9,51.18 ; 44.7,51.18 v1(44.7,52.58) ; 44.7,51.18 43.51,51.18 ; 17.5,5.64 J7.3 19.33,7.47 ; 57.48,29.72 U12.1 ; U12.1 58.93,31.17 ; 40.89,51.18 v1(40.89,52.58) ; 40.89,51.18 42.09,51.18 ; 40.89,51.18 39.7,51.18 ; 72.97,36.45 75.36,36.45 ; 70.9,43.94 C13.2 ; C13.2 72.01,42.75 ; C13.2 72.01,45.14 ; 84.58,58.37 R13.1 ; R13.1 83.45,59.44 ; R13.1 85.71,59.44 ; U3.3 37.86,5.13 ; U3.3 37.08,4.32 36.32,5.08 36.32,7.34 J8.3 ; U3.3 37.86,3.51 ; v1(53.34,42.16) C14.2 C8.2 ; C11.2 v1(67.56,43.94) ; 27.71,9.65 D1.2 26.42,10.95 ; R15.1 95.87,59.44 ; R15.1 93.61,59.44 ; R15.1 94.74,58.37 ; U14.1 77.85,29.34 C43.2 C38.2 ; U14.1 77.47,31.17 ; U14.1 76.02,29.72 ; 56.77,55.3 C3.2 55.66,54.1 ; 52.32,51.18 v1(53.72,51.18)
VDD3V3: length 131.3
  TOP w0.203: v1(79.5,54.1) 77.72,54.1 76.94,53.32 U1.75 ; U1.6 v1(63.25,50.49) ; U8.1 v1(39.81,47.94) ; U10.8 45.34,62.36 v1(44.58,63.12) 44.58,64.77 ; R6.2 v1(77.22,15.75) ; R5.2 v1(91.69,14.48) ; U1.28 v1(64.34,37.59) 64.34,36.53 64.26,36.45 ; U1.11 v1(63.23,47.99) ; C3.1 59.03,54.59 v1(61.49,54.59) U1.100 ; v1(47.43,47.94) U7.1 47.43,46.16 46.48,45.21 U7.5 ; v1(43.62,47.94) U6.1 43.62,46.16 42.67,45.21 U6.5 ; v1(82.8,15.75) R8.2 R9.2 ; U1.50 75.36,39.37 75.95,39.37 76.71,38.61 v1(76.71,37.85) 76.71,36.45 ; U1.19 v1(63.2,43.99) ; R7.2 v1(78.99,15.75) ; R4.2 v1(88.39,15.75)
  TOP w0.254: C10.1 v1(79.5,54.1) ; R44.1 v1(97.79,44.45) ; U9.1 v1(51.24,48.01) ; U4.16 42.42,26.55 v1(42.42,24.64) C20.1 ; R3.2 v1(25.65,15.49) ; C16.1 v1(60.51,62.92) Y1.4 ; L1.1 v1(53.34,40.13) ; U12.2 57.4,27.18 55.63,28.96 U11.1 v1(55.63,32.77) C33.1 ; R11.1 v1(53.34,48.26) ; U14.2 75.69,27.18 74.17,28.7 U13.1 v1(74.17,32.26) ; R30.1 v1(97.79,22.35) ; R56.2 21.59,62.48 23.37,60.71 L4.2 ; R38.1 v1(97.79,51.82) ; R2.2 v1(23.88,15.49) ; R32.1 v1(97.79,29.72) ; R36.1 v1(97.79,15.24) ; R42.1 v1(97.79,37.08) ; R20.1 v1(41.66,56.13)
  POWRE w0.203: 60.38,27.18 U12.2 57.48,27.18 ; 78.92,27.18 U14.2 76.02,27.18 ; 71.88,67.61 U2.2 70.56,66.29 ; 71.88,62.43 U2.1 70.56,63.75
  BOTTOM w0.203: C6.1 64.63,47.99 v1(63.23,47.99) ; C29.1 47.43,48.32 v1(47.43,47.94) ; v1(43.62,47.94) 43.62,48.32 C31.2 ; v1(39.81,47.94) 39.81,48.32 C23.1 ; C5.1 63.94,50.49 v1(63.25,50.49) ; v1(51.24,48.01) 51.24,48.32 C25.1 ; C3.1 59.03,54.59 v1(61.49,54.59) ; v1(63.2,43.99) 64.59,43.99 C11.1
  BOTTOM w0.254: U14.2 77.85,27.56 C43.1 C38.1 ; C39.1 v1(74.17,32.26) ; C10.1 v1(79.5,54.1) ; U12.2 59.31,27.56 C37.1 C32.1
  vias: v1(32.51,55.88) v1(32.51,54.86) v1(33.27,55.88) v1(33.27,54.86) v1(34.04,55.88) v1(34.04,54.86)
VDD5V: length 21.9
  TOP w0.254: U9.6 v1(51.24,43.18) 51.24,42.1 51.31,42.04 ; U8.6 40.21,44.37 40.89,43.69 v1(40.89,43.18) ; U7.6 v1(47.43,43.18) 47.43,42.1 47.5,42.04 ; U6.6 v1(43.62,43.18) 43.62,42.73 42.93,42.04 ; R48.2 21.59,31.5 23.37,29.72 L2.2
  BOTTOM w0.254: 40.89,42.04 v1(40.89,43.18)
  vias: v1(27.18,29.46) v1(27.18,28.45) v1(28.19,29.46) v1(28.19,28.45)
VDD12V_O: length 11.5
  TOP w0.254: L3.2 23.37,45.21 21.59,46.99 R52.2
  vias: v1(32.77,40.39) v1(32.77,39.37) v1(33.78,40.39) v1(33.78,39.37)
VDD24V: length 11.4
  BOTTOM w0.254: R41.1 v1(118.87,38.35) ; R29.1 v1(118.87,23.62) ; R31.1 v1(118.87,30.99) ; R37.1 v1(118.87,53.09) ; R43.1 v1(118.87,45.72) ; R35.1 v1(118.87,16.26)
  vias: v1(6.86,19.05) v1(6.86,18.29) v1(7.87,19.05) v1(7.87,18.29) v1(8.89,19.05) v1(8.89,18.29)
CAN1G: length 21.4
  TOP w0.254: v1(62.99,17.78) 62.99,9.12 J9.7
  BOTTOM w0.254: R24.2 v1(62.99,17.78) ; D9.3 62.74,3.56 64.77,5.59 64.77,7.34 J9.7 ; C36.2 v1(62.99,25.4) ; C34.1 v1(60.96,17.78) ; C35.2 v1(60.96,25.4)
CAN1H: length 26.7
  TOP w0.254: U11.7 J5.1
  BOTTOM w0.254: 57.91,4.57 57.61,4.57 ; 57.91,4.57 60.73,7.39 J9.5 ; 57.91,4.57 57.91,4.27 ; 57.91,4.57 57.76,4.42 ; 57.61,4.57 57.76,4.42 ; 57.61,4.57 55.88,6.3 55.88,13.72 J5.1 ; 57.76,4.42 57.91,4.27 ; 57.91,4.27 D9.1
CAN1L: length 27.8
  TOP w0.254: J9.6 61.21,12.19 R21.2 52.83,14.48 50.55,16.76 U11.6
  BOTTOM w0.254: J9.6 62.99,9.12 62.99,6.6 60.88,4.5 D9.2
CAN2G: length 24.3
  TOP w0.254: U13.5 66.55,12.73 J9.8
  BOTTOM w0.254: D10.3 66.55,4.72 66.55,9.06 J9.8 ; C42.2 v1(79.5,25.4) ; C41.2 v1(81.53,25.4) ; C40.1 v1(79.5,17.78) ; R28.2 v1(81.53,17.78)
CAN2H: length 18.9
  TOP w0.254: U13.7 J6.1 71.63,10.92 68.21,7.51 J9.9
  BOTTOM w0.254: J9.9 69.72,5.89 D10.1
CAN2L: length 33.9
  TOP w0.254: U13.6 69.09,17.18 arc(69.03,17.04) 68.9,16.99 68.26,16.99 arc(68.07,16.8) 68.26,16.61 68.9,16.61 arc(69.09,16.42) 68.9,16.23 68.26,16.23 arc(68.07,16.04) 68.26,15.85 68.9,15.85 arc(69.09,15.65) 68.9,15.46 68.26,15.46 arc(68.07,15.27) 68.26,15.08 68.9,15.08 arc(69.09,14.89) 68.9,14.7 68.26,14.7 arc(68.07,14.51) 68.26,14.32 68.9,14.32 arc(69.03,14.27) 69.09,14.13 69.09,11.77 J9.10
  BOTTOM w0.254: R25.2 72.62,10.89 J9.10 70.61,8.5 70.61,3.51 D10.2
MCU_B_RX3: length 30.8
  TOP w0.254: U8.4 37.51,44.37 35.56,42.42 35.56,21.84 34.54,20.83 34.54,17.02 J3.3
MCU_B_RX4: length 30.9
  TOP w0.254: J4.3 45.21,17.02 45.21,20.83 46.74,22.35 46.74,33.02 49.34,35.63 U9.4
MCU_B_TX3: length 30.6
  TOP w0.254: J1.3 36.07,20.57 36.07,39.12 37.34,40.39 39.37,40.39 41.72,42.74 U6.4
MCU_B_TX4: length 28.4
  TOP w0.254: J2.3 46.23,23.11 46.23,36.32 45.53,37.02 U7.4
MCU_CAN1D: length 31.5
  TOP w0.203: v1(68.58,48.01) 72.34,51.77 U1.82 ; R23.1 v1(50.55,37.59)
  POWRE w0.203: v1(50.55,37.59) 52.07,39.12 59.69,39.12 v1(68.58,48.01)
MCU_CAN1R: length 29.9
  TOP w0.203: v1(69.85,48.01) 72.84,51 U1.81 ; R22.1 v1(53.09,37.59)
  POWRE w0.203: v1(69.85,48.01) 60.45,38.61 54.1,38.61 v1(53.09,37.59)
MCU_CAN2D: length 7.2
  TOP w0.203: U1.52 75.9,41.49 75.69,41.29 75.69,40.64 78.49,37.85 R27.1
MCU_CAN2R: length 6.5
  TOP w0.203: R26.1 80.26,38.86 78.14,40.99 U1.51
MCU_CLK: length 14.4
  TOP w0.203: U1.12 61.73,47.5 59.94,47.5 52.83,54.61 R10.1
MCU_JTAG_TCK: length 15.9
  TOP w0.203: U2.9 80.77,65.02 79.01,65.02 78.23,64.24 78.23,56.9 75.93,54.59 U1.76
MCU_JTAG_TDI: length 10
  TOP w0.203: U2.5 74.84,61.63 U1.77
MCU_JTAG_TDO: length 23.1
  TOP w0.203: U1.89 68.84,56.4 v1(69.6,57.15)
  POWRE w0.203: U2.13 85.09,61.72 74.17,61.72 v1(69.6,57.15)
MCU_JTAG_TMS: length 15.3
  TOP w0.203: U1.72 76.93,51.51 75.75,51.51 75.44,51.82 75.44,53.09 79.5,57.15 U2.7
MCU_JTAG_TRSTN: length 11.7
  TOP w0.203: U2.3 68.34,57.67 U1.90
MCU_NRST: length 42.6
  TOP w0.203: v1(71.37,52.07) 65.79,46.49 U1.14 56.52,46.49 56.39,46.35 ; 56.39,46.35 C17.2 ; 56.39,46.35 R11.2
  POWRE w0.203: v1(71.37,52.07) 80.52,61.21 87.12,61.21 U2.15
MCU_RUN: length 91.2
  TOP w0.203: v1(81.53,38.86) 78.4,41.99 U1.53
  TOP w0.254: D1.4 29.72,3.81 68.83,3.81 v1(73.91,8.89)
  BOTTOM w0.254: v1(81.53,38.86) 83.06,37.34 83.06,18.03 v1(73.91,8.89)
MCU_RX1: length 48.8
  TOP w0.203: v1(40.64,28.7) 39.81,27.87 U4.12 ; v1(72.9,48.26) 74.63,49.99 U1.69
  BOTTOM w0.203: v1(40.64,28.7) 40.64,30.73 46.74,36.83 61.47,36.83 v1(72.9,48.26)
MCU_RX2: length 32.2
  TOP w0.203: v1(40.13,31.24) 37.86,28.97 U4.9 ; U1.26 v1(62.48,39.39)
  BOTTOM w0.203: v1(40.13,31.24) 48.28,39.39 v1(62.48,39.39)
MCU_RX3: length 41.9
  TOP w0.203: v1(69.34,46.23) 74.34,41.23 U1.48 ; U8.3 v1(37.91,46.04)
  BOTTOM w0.203: v1(69.34,46.23) 68.83,46.74 38.61,46.74 v1(37.91,46.04)
MCU_RX4: length 30.7
  TOP w0.203: U1.79 73.84,53.27 v1(73.66,53.09) ; U9.3 49.34,50.87 v1(50.29,51.82)
  BOTTOM w0.203: v1(73.66,53.09) 73.15,52.58 71.8,52.58 71.65,52.73 71.1,52.73 70.95,52.58 51.05,52.58 v1(50.29,51.82)
MCU_SCL: length 24.8
  TOP w0.203: v1(47.78,59.82) U10.6 ; U1.92 67.34,57.37 v1(66.29,58.42)
  BOTTOM w0.203: v1(47.78,59.82) 64.9,59.82 v1(66.29,58.42)
MCU_SDA: length 23.2
  TOP w0.203: v1(47.7,58.55) U10.5 ; v1(65.28,57.91) 66.84,56.35 U1.93
  BOTTOM w0.203: v1(47.7,58.55) 64.64,58.55 v1(65.28,57.91)
MCU_TX1: length 48.3
  TOP w0.203: v1(41.4,30.48) 39.16,28.23 U4.11 ; v1(72.9,47.24) 75.14,49.49 U1.68
  BOTTOM w0.203: v1(72.9,47.24) 61.98,36.32 47.24,36.32 v1(41.4,30.48)
MCU_TX2: length 31.6
  TOP w0.203: U4.10 38.51,28.6 v1(39.37,29.46) ; U1.25 v1(60.2,40.99)
  BOTTOM w0.203: v1(39.37,29.46) 39.37,31.41 48.95,40.99 v1(60.2,40.99)
MCU_TX3: length 36.5
  TOP w0.203: v1(68.83,45.47) 73.84,40.46 U1.47 ; U6.3 v1(41.72,46.04)
  BOTTOM w0.203: v1(68.83,45.47) 68.26,46.04 v1(41.72,46.04)
MCU_TX4: length 35.9
  TOP w0.203: v1(73.66,52.07) 74.34,52.75 U1.78 ; U7.3 45.53,50.36 47.75,52.58 53.59,52.58 v1(54.36,51.82)
  BOTTOM w0.203: v1(73.66,52.07) 73.41,51.82 72.05,51.82 71.65,51.41 71.1,51.41 70.69,51.82 v1(54.36,51.82)
MCU_WP: length 29.9
  TOP w0.203: 46.35,61.09 45.34,61.09 44.7,60.45 R20.2 v1(46.99,56.13) ; U1.95 v1(65.84,56.08)
  BOTTOM w0.203: v1(46.99,56.13) 48.26,57.4 64.52,57.4 v1(65.84,56.08)
OPT_D1: length 36.5
  TOP w0.203: U1.65 81.3,47.99 95.25,34.04 95.25,28.19 R30.2 U15.4
OPT_D2: length 42.8
  TOP w0.203: U1.64 80.27,47.49 93.47,34.29 93.47,22.61 R36.2 U17.4
OPT_D3: length 27.4
  TOP w0.203: U1.67 89.19,48.99 R42.2 U19.4
OPT_D4: length 30.3
  TOP w0.203: U16.4 R32.2 82.32,48.49 U1.66
OPT_D5: length 25.6
  TOP w0.203: U1.71 92.9,50.99 97.03,55.12 R38.2 U18.4
OPT_D6: length 25
  TOP w0.203: U1.70 95.05,50.49 R44.2 U20.4
OPT_IN1: length 34.6
  TOP w0.254: J14.1 97.79,9.06 97.79,11.68 101.35,15.24 112.52,15.24 114.81,17.53 114.81,21.34 v1(112.52,23.62) R33.1
  BOTTOM w0.254: R29.2 v1(112.52,23.62)
OPT_IN2: length 20.3
  TOP w0.254: J14.2 101.49,16.26 R39.1 v1(112.52,16.26)
  BOTTOM w0.254: R35.2 v1(112.52,16.26)
OPT_IN3: length 48.4
  TOP w0.254: J14.3 101.35,9.12 101.35,11.68 102.62,12.95 112.52,12.95 116.33,16.76 116.33,34.54 v1(112.52,38.35) R45.1
  BOTTOM w0.254: R41.2 v1(112.52,38.35)
OPT_IN4: length 36.7
  TOP w0.254: J14.4 102.95,14.22 112.52,14.22 115.57,17.27 115.57,27.94 v1(112.52,30.99) R34.1
  BOTTOM w0.254: v1(112.52,30.99) R31.2
OPT_IN5: length 62.4
  TOP w0.254: R40.1 v1(112.52,53.09) 117.86,47.75 117.86,15.75 107.7,5.59 104.93,5.59 J14.5
  BOTTOM w0.254: R37.2 v1(112.52,53.09)
OPT_IN6: length 52.2
  TOP w0.254: R46.1 v1(112.52,45.72) 117.09,41.15 117.09,16.26 109.95,9.12 104.9,9.12 J14.6
  BOTTOM w0.254: R43.2 v1(112.52,45.72)
OPT_LED1: length 44
  TOP w0.203: U1.60 81,45.49 v1(81.53,44.96)
  BOTTOM w0.203: 90.93,35.56 v1(81.53,44.96)
  BOTTOM w0.254: D2.2 90.93,35.56
OPT_LED2: length 45.7
  TOP w0.203: v1(81.53,43.94) 80.49,44.99 U1.59
  BOTTOM w0.203: v1(81.53,43.94) 89.66,35.81
  BOTTOM w0.254: 89.66,35.81 89.66,8.38 D2.4
OPT_LED3: length 38.7
  TOP w0.203: U1.55 78.42,42.99 v1(81.53,39.88)
  BOTTOM w0.203: v1(81.53,39.88) 83.82,37.59
  BOTTOM w0.254: D3.2 83.82,13.72 83.82,37.59
OPT_LED4: length 42.5
  TOP w0.203: U1.56 78.94,43.49 v1(81.53,40.89)
  BOTTOM w0.203: v1(81.53,40.89) 84.33,38.1
  BOTTOM w0.254: 84.33,38.1 84.33,13.46 81.28,10.41 81.28,8.64 D3.4
OPT_LED5: length 39.3
  TOP w0.203: v1(81.53,41.91) 79.45,43.99 U1.57
  BOTTOM w0.203: 85.34,38.1 v1(81.53,41.91)
  BOTTOM w0.254: D4.2 85.34,38.1
OPT_LED6: length 43.7
  TOP w0.203: v1(81.53,42.93) 79.97,44.49 U1.58
  BOTTOM w0.203: v1(81.53,42.93) 86.61,37.85
  BOTTOM w0.254: D4.4 86.61,8.38 86.61,37.85
RS232_RX1: length 11.7
  TOP w0.254: J3.1 39.88,17.27 39.88,23.88 40.46,24.46 U4.13
RS232_RX2: length 21.3
  TOP w0.254: U4.8 v1(37.34,33.39)
  BOTTOM w0.254: J4.1 42.67,17.02 42.67,21.08 36.83,26.92 36.83,32.88 v1(37.34,33.39)
RS232_TX1: length 13.6
  TOP w0.254: U4.14 41.11,22.57 v1(40.64,22.1)
  BOTTOM w0.254: v1(40.64,22.1) 38.61,20.07 35.05,20.07 J1.1
RS232_TX2: length 18.4
  TOP w0.254: U4.7 v1(38.51,31.75)
  BOTTOM w0.254: J2.1 38.51,26.26 v1(38.51,31.75)
RS_RX1: length 15.8
  TOP w0.254: J8.6 35.81,14.96 J3.2
  BOTTOM w0.254: J8.6 41.66,9.12 41.66,4.57 40.75,3.67 U3.2
RS_RX2: length 15.3
  TOP w0.254: J4.2 43.94,13.83 J8.10
  BOTTOM w0.254: J8.10 48.77,9 48.77,4.57 47.86,3.67 U5.2
RS_TX1: length 15
  BOTTOM w0.254: U3.1 39.88,4.98 J8.5 39.85,7.39 38.1,9.14 38.1,12.7 37.08,13.72 37.08,17.02 J1.2
RS_TX2: length 14.6
  BOTTOM w0.254: U5.1 46.88,5.06 J8.9 45.21,9.06 45.21,17.02 J2.2
N906412: length 4.1
  TOP w0.254: U11.2 R22.2
N906436: length 4.1
  TOP w0.254: U11.3 R23.2
N916667: length 2.8
  TOP w0.254: R2.1 D1.1
N916697: length 6.1
  TOP w0.254: R3.1 25.15,11.94 25.15,8.38 D1.3
N917504: length 3.7
  TOP w0.203: R10.2 Y1.3
N939209: length 6.6
  TOP w0.254: C18.1 43.82,29.08 41.11,31.79 U4.3
N939217: length 4.1
  TOP w0.254: C18.2 44.96,31.75 43.32,33.39 U4.1
N939351: length 3.7
  TOP w0.254: 39.24,36.83 39.24,36.7 39.81,36.14 U4.5
N939359: length 3.7
  TOP w0.254: U4.4 40.46,36.14 41.02,36.7 C19.2
N939363: length 3.8
  TOP w0.254: U4.2 41.76,35.53 42.93,36.7
N939401: length 4.1
  TOP w0.254: 37.34,36.7 39.16,34.88 U4.6
N940473: length 5.7
  TOP w0.254: U15.1 R33.2 C44.1
N940651: length 5.7
  TOP w0.254: U17.1 R39.2 C46.1
N944032: length 5.7
  TOP w0.254: C48.1 R45.2 U19.1
N944787: length 5.7
  TOP w0.254: U16.1 R34.2 C45.1
N944965: length 5.7
  TOP w0.254: U18.1 R40.2 C47.1
N945149: length 5.7
  TOP w0.254: U20.1 R46.2 C49.1
N954923: length 9.7
  TOP w0.254: R47.2 11.68,33.53 10.29,32.13 10.29,31.5 ; 10.29,31.5 U21.4 ; 10.29,31.5 R48.1
N955027: length 4.3
  TOP w0.254: U21.1 14.1,28.32 14.86,29.08 C50.1
N958142: length 9.7
  TOP w0.254: R51.2 11.68,49.02 10.29,47.62 10.29,46.99 ; 10.29,46.99 U24.4 ; 10.29,46.99 R52.1
N958246: length 4.3
  TOP w0.254: U24.1 14.1,43.81 14.86,44.58 17.02,44.58
N959208: length 9.7
  TOP w0.254: R56.1 10.29,62.48 ; 10.29,62.48 U25.4 ; 10.29,62.48 10.29,63.12 11.68,64.52 R55.2
N959312: length 4.3
  TOP w0.254: U25.1 14.1,59.31 14.86,60.07 C68.1
N963314: length 11.2
  TOP w0.254: R26.2 78.74,33.02 72.64,33.02 71.63,32 U13.2
N963338: length 12.4
  TOP w0.254: U13.3 69.09,32.26 70.36,33.53 77.98,33.53 78.49,34.04 R27.2
N9062780: length 3.3
  TOP w0.254: R21.1 J5.2
N9631840: length 2
  BOTTOM w0.254: R25.1 J6.2
N16779023: length 6.5
  TOP w0.203: U1.99 63.84,55.71 63.42,56.13 R12.2
N16782804: length 2.8
  TOP w0.254: R4.1 D2.1
N16782939: length 6.1
  TOP w0.254: D2.3 89.66,8.38 89.66,11.94 R5.1
N16782977: length 2.8
  TOP w0.254: R6.1 D3.1
N16783006: length 6.1
  TOP w0.254: R7.1 78.49,11.94 78.49,8.38 D3.3
N16783035: length 2.8
  TOP w0.254: D4.1 R8.1
N16783064: length 6.1
  TOP w0.254: R9.1 84.07,11.94 84.07,8.38 D4.3
N16794703: length 5
  TOP w0.203: U1.49 v1(74.84,41.91)
  BOTTOM w0.203: v1(74.84,41.91) 74.84,42.89 73.79,43.94
N16794705: length 4.5
  TOP w0.203: C12.1 81.33,51.99 U1.73
N16799024: length 7.1
  TOP w0.203: C8.1 v1(57.4,44.2) R1.1 58.93,44.2 60.13,42.99 U1.21
  BOTTOM w0.203: v1(57.4,44.2) C8.1
N16895166: length 2.3
  BOTTOM w0.254: R13.2 U2.11
N16895168: length 2.3
  BOTTOM w0.254: R15.2 U2.19
N16895170: length 2.3
  BOTTOM w0.254: R14.2 U2.17

## Copper pours and planes (outline as drawn; the poured copper is in the pictures)
GND on TOP: 0.76,69.09 119.13,69.09 119.13,0.76 0.76,0.76 ; 58 cut-outs
GND on BOTTOM: 0.76,69.09 119.13,69.09 119.13,0.76 0.76,0.76 ; 34 cut-outs
GND on GND: 0.76,69.09 119.13,69.09 119.13,0.76 0.76,0.76 ; 4 cut-outs
VDD3V3 on TOP: 21.84,60.45 27.18,60.45 27.43,60.2 27.43,58.67 27.69,58.42 34.29,58.42 34.54,58.17 34.54,54.1 34.29,53.85 26.92,53.85 26.42,54.36 26.42,57.15 25.91,57.66 21.84,57.66 21.59,57.91 21.59,60.2
VDD3V3 on POWRE: 0.76,0.76 119.13,0.76 119.13,69.09 0.76,69.09 ; 41 cut-outs
VDD5V on TOP: 33.53,12.95 34.04,12.45 34.04,5.84 33.78,5.59 29.21,5.59 28.7,6.1 28.7,26.16 28.19,26.67 21.84,26.67 21.59,26.92 21.59,30.23 21.84,30.48 30.48,30.48 30.73,30.23 30.73,13.72 31.5,12.95
VDD5V on POWRE: 31.24,43.94 51.56,43.94 51.82,43.69 51.82,42.67 51.56,42.42 31.5,42.42 28.7,39.62 28.7,26.92 28.45,26.67 26.92,26.67 26.67,26.92 26.67,39.37
VDD12V_O on TOP: 21.84,44.96 27.18,44.96 27.43,44.7 27.43,43.18 27.69,42.93 34.29,42.93 34.54,42.67 34.54,38.61 34.29,38.35 26.92,38.35 26.42,38.86 26.42,41.66 25.91,42.16 21.84,42.16 21.59,42.42 21.59,44.7
VDD12V_O on POWRE: 52.32,32 52.32,12.95 52.83,12.45 54.86,12.45 55.63,11.68 55.63,6.1 55.12,5.59 49.78,5.59 49.28,6.1 49.28,32.51 43.43,38.35 32.51,38.35 32.26,38.61 32.26,40.89 32.51,41.15 43.18,41.15
VDD24V on TOP: 8.89,14.99 3.81,14.99 3.3,15.49 3.3,18.8 4.06,19.56 5.59,19.56 6.1,20.07 6.1,58.17 6.35,58.42 7.87,58.42 8.13,58.17 8.13,56.13 8.64,55.63 12.7,55.63 13.21,55.12 13.21,52.07 12.95,51.82 12.7,51.82 12.45,52.07 12.45,54.1 12.19,54.36 8.64,54.36 8.13,53.85 8.13,40.64 8.64,40.13 12.7,40.13 13.21,39.62 13.21,36.58 12.95,36.32 12.7,36.32 12.45,36.58 12.45,38.61 12.19,38.86 8.64,38.86 8.13,38.35 8.13,25.15 8.64,24.64 12.7,24.64 13.21,24.13 13.21,21.08 12.95,20.83 12.7,20.83 12.45,21.08 12.45,23.11 12.19,23.37 9.65,23.37 9.4,23.11 9.4,15.49
VDD24V on POWRE: 10.16,19.56 10.54,19.18 10.54,8.51 16.76,2.29 103.89,2.29 113.03,11.43 113.03,59.18 113.54,59.69 118.62,59.69 119.13,59.18 119.13,15.49 104.39,0.76 16.26,0.76 5.33,11.68 5.33,19.05 5.84,19.56
CAN1_5V on TOP: 59.69,23.11 55.37,23.11 55.12,22.86 55.12,20.32 55.37,20.07 59.69,20.07 59.94,20.32 59.94,22.86
CAN1_5V on BOTTOM: 58.17,23.11 63.5,23.11 63.75,22.86 63.75,20.32 63.5,20.07 58.17,20.07 57.91,20.32 57.91,22.86
CAN1G on TOP: 49.53,25.65 47.5,23.62 47.5,20.32 47.75,20.07 48.26,20.07 48.51,20.32 48.51,23.37 48.77,23.62 59.69,23.62 60.2,23.11 60.2,17.78 60.45,17.53 63.5,17.53 63.75,17.78 63.75,25.4 63.5,25.65
CAN2_5V on TOP: 78.23,23.11 73.91,23.11 73.66,22.86 73.66,20.32 73.91,20.07 78.23,20.07 78.49,20.32 78.49,22.86
CAN2_5V on BOTTOM: 76.71,23.11 82.04,23.11 82.3,22.86 82.3,20.32 82.04,20.07 76.71,20.07 76.45,20.32 76.45,22.86
CAN2G on TOP: 68.07,25.65 66.04,23.62 66.04,20.32 66.29,20.07 66.8,20.07 67.06,20.32 67.06,23.37 67.31,23.62 78.23,23.62 78.74,23.11 78.74,17.78 78.99,17.53 82.04,17.53 82.3,17.78 82.3,25.4 82.04,25.65
OVDD24V on TOP: 15.49,6.1 15.49,17.27 14.73,18.03 12.45,18.03 12.19,17.78 12.19,6.1 12.45,5.84 15.24,5.84
N955031 on TOP: 24.89,22.61 25.15,22.35 25.15,20.07 24.89,19.81 19.05,19.81 18.8,20.07 18.8,23.11 18.54,23.37 14.73,23.37 14.48,23.11 14.48,21.08 14.22,20.83 13.97,20.83 13.72,21.08 13.72,25.4 13.97,25.65 15.75,25.65 16,25.91 16,27.69 16.26,27.94 19.81,27.94 20.07,27.69 20.07,22.86 20.32,22.61
N958250 on TOP: 24.89,38.1 25.15,37.85 25.15,35.56 24.89,35.31 19.05,35.31 18.8,35.56 18.8,38.61 18.54,38.86 14.73,38.86 14.48,38.61 14.48,36.58 14.22,36.32 13.97,36.32 13.72,36.58 13.72,40.89 13.97,41.15 15.75,41.15 16,41.4 16,43.18 16.26,43.43 19.81,43.43 20.07,43.18 20.07,38.35 20.32,38.1
N959316 on TOP: 24.89,53.59 25.15,53.34 25.15,51.05 24.89,50.8 19.05,50.8 18.8,51.05 18.8,54.1 18.54,54.36 14.73,54.36 14.48,54.1 14.48,52.07 14.22,51.82 13.97,51.82 13.72,52.07 13.72,56.39 13.97,56.64 15.75,56.64 16,56.9 16,58.67 16.26,58.93 19.81,58.93 20.07,58.67 20.07,53.85 20.32,53.59

## Text on the board
Ref Des/Silkscreen Top: 24V | G | TYPE:INTF | VER :1.0 | DES :YK | R | T
COMPVAL_TYPE_TOP: FIGURE | FINISHED_SIZE | 13.0 | 32.0 | 36.0 | 40.0 | 55.0 | 134.0 | DRILL CHART: TOP to BOTTOM | ALL UNITS ARE IN MILS | PLATED | QTY | 177 | 16 | 4 | 20 | 8 | 12 | 32
